# EAGLE board Logic level converter (EAGLE 7.6.0)
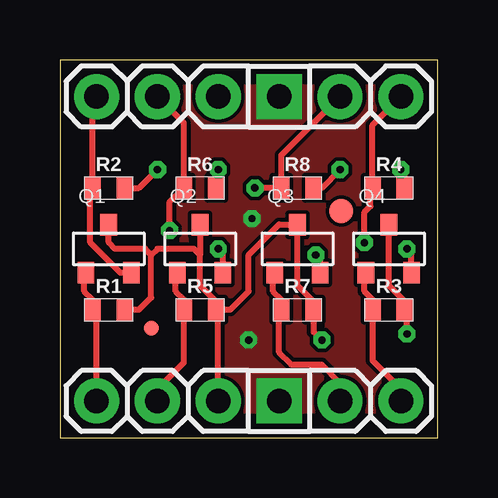
[diagram p0: board, top side]
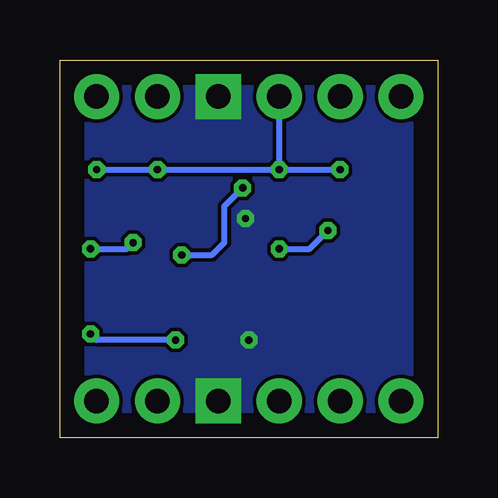
[diagram p1: board, bottom side, seen from below]

Size 15.75 x 15.75 mm. Coordinates in mm from the lower left corner, seen from the top.
Outline: 0,0 15.75,0 15.75,15.75 0,15.75 0,0
Copper layers (1*16): Top 0.035mm / dielectric 1.5mm / Bottom 0.035mm
Design rules "default *": minimum track width 10mil, minimum drill 24mil, track to track 6mil, track to pad 6mil, pad to pad 6mil, via to via 6mil, smd to smd 6mil, copper to edge 40mil, drill to drill 8mil, minimum pad ring 10mil, minimum via ring 8mil, stop-mask expansion 4mil, vias tented up to drill 0.3mm, thermal gap 10mil

## Footprints (pad centres in the part's own frame; a part is rotated, then mirrored left to right if it is on the bottom)
FIDUCIAL-1X2 = smd 1 x 1: 1 0,0
FIDUCIAL-MICRO = smd 0.635 x 0.635: 1 0,0
JUMPER_6PIN_LLC_LV = drill 1.016 pad 1.88: 1 -6.35,0; 2 -3.81,0; 5 3.81,0; 6 6.35,0; LV -1.27,0 | drill 1.016 pad 1.88 square: GND 1.27,0
JUMPER_6PIN_LLC_HV = drill 1.016 pad 1.88: 1 -6.35,0; 2 -3.81,0; 5 3.81,0; 6 6.35,0; HV -1.27,0 | drill 1.016 pad 1.88 square: GND 1.27,0
SOT-23 = smd 0.7 x 0.9: D 0,1; G -0.95,-1; S 0.95,-1
0603_RESISTOR = smd 0.7 x 0.95: P$1 -0.675,0; P$2 0.675,0

## Placement (x,y rotation side)
E$1  [E-R.IO-BACK-6MM]  4.7,9.12 0 top
E$3  [OSH-BACK-3MM]  12.19,3.05 0 top
E$4  [LOGO-BACK-3MM]  0.71,3.37 0 top
FD1  FIDUCIAL1X2  [FIDUCIAL-1X2]  11.73,9.45 0 top
FD2  FIDUCIALUFIDUCIAL  [FIDUCIAL-MICRO]  3.81,4.57 0 top
FRAME1  FRAME-LETTERNO_PACKAGE  [DUMMY]  -0.25,-0.25 0 top
JP1  JUMPER_6PIN_LLC_LV  [JUMPER_6PIN_LLC_LV]  7.87,1.52 0 top
JP2  JUMPER_6PIN_LLC_HV  [JUMPER_6PIN_LLC_HV]  7.87,14.22 0 top
Q1  BSS138  [SOT-23]  2.03,7.88 0 top
Q2  BSS138  [SOT-23]  5.84,7.87 0 top
Q3  BSS138  [SOT-23]  9.91,7.87 0 top
Q4  BSS138  [SOT-23]  13.72,7.87 0 top
R1  10k  [0603_RESISTOR]  2.03,5.33 0 top
R2  10k  [0603_RESISTOR]  2.03,10.41 0 top
R3  10k  [0603_RESISTOR]  13.72,5.33 0 top
R4  10k  [0603_RESISTOR]  13.72,10.41 0 top
R5  10k  [0603_RESISTOR]  5.84,5.33 0 top
R6  10k  [0603_RESISTOR]  5.84,10.41 0 top
R7  10k  [0603_RESISTOR]  9.91,5.33 0 top
R8  10k  [0603_RESISTOR]  9.91,10.41 0 top

## Library data of the parts
E$1 E$3 E$4 = ERADIONICA
FD1 FD2 = SparkFun-Aesthetics
FRAME1 = SparkFun-Aesthetics; DESIGNER: Nobody; VERSION: v01
JP1 JP2 Q1-Q4 R1-R8 = Bruno_library2

## Nets
GND: JP1.GND JP2.GND
HV: JP2.HV R2.P$2 R4.P$2 R6.P$2 R8.P$2
HV1: JP2.1 Q1.S R2.P$1
HV2: JP2.2 Q2.S R6.P$1
HV3: JP2.5 Q3.S R8.P$1
HV4: JP2.6 Q4.S R4.P$1
LV: JP1.LV Q1.D Q2.D Q3.D Q4.D R1.P$2 R3.P$2 R5.P$2 R7.P$2
LV1: JP1.1 Q1.G R1.P$1
LV2: JP1.2 Q2.G R5.P$1
LV3: JP1.5 Q3.G R7.P$1
LV4: JP1.6 Q4.G R3.P$1

## Tracks (layer width: path | path; a pad name or v marks a point on that pad's centre or on a via)
GND  (via drill 0.3)
  other vias: 7.87,4.06 8.01,9.13
  pour Bottom (no thermals): 0,15.74 0,0 15.75,0 15.75,15.74
  pour Top (no thermals): 0,15.74 0,0 15.75,0 15.75,15.74
HV  (via drill 0.3)
  Top 0.254: 6.69,10.5 6.6,10.5 R6.P$2 6.52,11.09 v6.6,11.18 | R4.P$2 14.39,11.01 v14.22,11.18 | R2.P$2 3.3,10.41 v4.06,11.18 | R8.P$2 10.92,10.41 v11.68,11.18
  Bottom 0.254: v14.22,11.18 v11.68,11.18 v6.6,11.18 | v6.6,11.18 v4.06,11.18 | v6.6,11.18 JP2.HV
HV1
  Top 0.254: JP2.1 1.36,14.06 R2.P$1 1.27,10.33 1.27,8.13 2.52,6.88 Q1.S
HV2  (via drill 0.3)
  Top 0.254: JP2.2 5.17,13.12 R6.P$1 4.57,9.82 v4.57,8.64 | Q2.S 6.79,7.69 v6.6,7.87
  Bottom 0.254: v6.6,7.87 5.33,7.87 v4.57,8.64
HV3  (via drill 0.3)
  Top 0.254: Q3.S 10.86,7.43 v10.67,7.62 | 8.98,10.67 R8.P$1 | R8.P$1 9.23,11.77 JP2.5 | R8.P$1 v8.13,10.41
  Bottom 0.254: v10.67,7.62 9.4,7.62 8.89,8.13 8.89,9.65 v8.13,10.41
HV4  (via drill 0.3)
  Top 0.254: JP2.6 13.04,13.04 R4.P$1 12.95,10.33 12.95,9.65 12.7,9.4 v12.7,8.13 | Q4.S 14.67,7.69 v14.48,7.87
  Bottom 0.254: v14.48,7.87 12.95,7.87 v12.7,8.13
LV  (via drill 0.3)
  Top 0.254: 3.81,7.62 3.56,7.87 2.29,7.87 2.03,8.13 Q1.D | R1.P$2 3.3,5.33 3.81,5.84 3.81,7.62 | 5.84,7.62 5.59,7.87 4.06,7.87 3.81,7.62 | Q2.D 5.84,7.62 | R5.P$2 6.52,5.67 5.84,6.35 5.84,7.62 | JP1.LV 6.6,5.25 R5.P$2 | R5.P$2 7.11,5.33 7.87,6.1 7.87,7.62 9.14,8.89 9.89,8.89 Q3.D 9.91,6.35 10.58,5.67 R7.P$2 10.58,4.41 v10.92,4.06 | Q4.D 13.72,6.35 14.39,5.67 R3.P$2 14.48,5.25 v14.48,4.32
  Bottom 0.254: v10.92,4.06 14.22,4.06 v14.48,4.32
LV1
  Top 0.254: JP1.1 1.52,5.17 R1.P$1 1.36,5.75 1.02,6.1 1.02,6.81 Q1.G
LV2
  Top 0.254: JP1.2 4.06,2.03 5.17,3.13 R5.P$1 5.17,5.75 4.83,6.1 4.83,6.81 Q2.G
LV3
  Top 0.254: JP1.5 11.68,2.29 10.92,3.05 9.65,3.05 9.14,3.56 9.14,5.25 R7.P$1 9.23,5.75 8.89,6.1 8.89,6.81 Q3.G
LV4
  Top 0.254: JP1.6 14.22,2.03 13.04,3.21 R3.P$1 13.04,5.75 12.7,6.1 12.7,6.81 Q4.G

## Text on the board
200bmp: HV1 | HV2 | HV | HV3 | HV4 | GND | LV1 | LV2 | LV | GND | LV3 | LV4
208bmp: Logic-level / converter